# Altium PCB Current Transducer PCB.PcbDoc
Units mm, origin at the board's own origin, x right, y up, seen from the top; angles counter-clockwise.
Board outline 40 x 50.4 mm, 2 copper layers (Top Layer, Bottom Layer); 5 components, 4 nets, 20 pads, 0 vias.
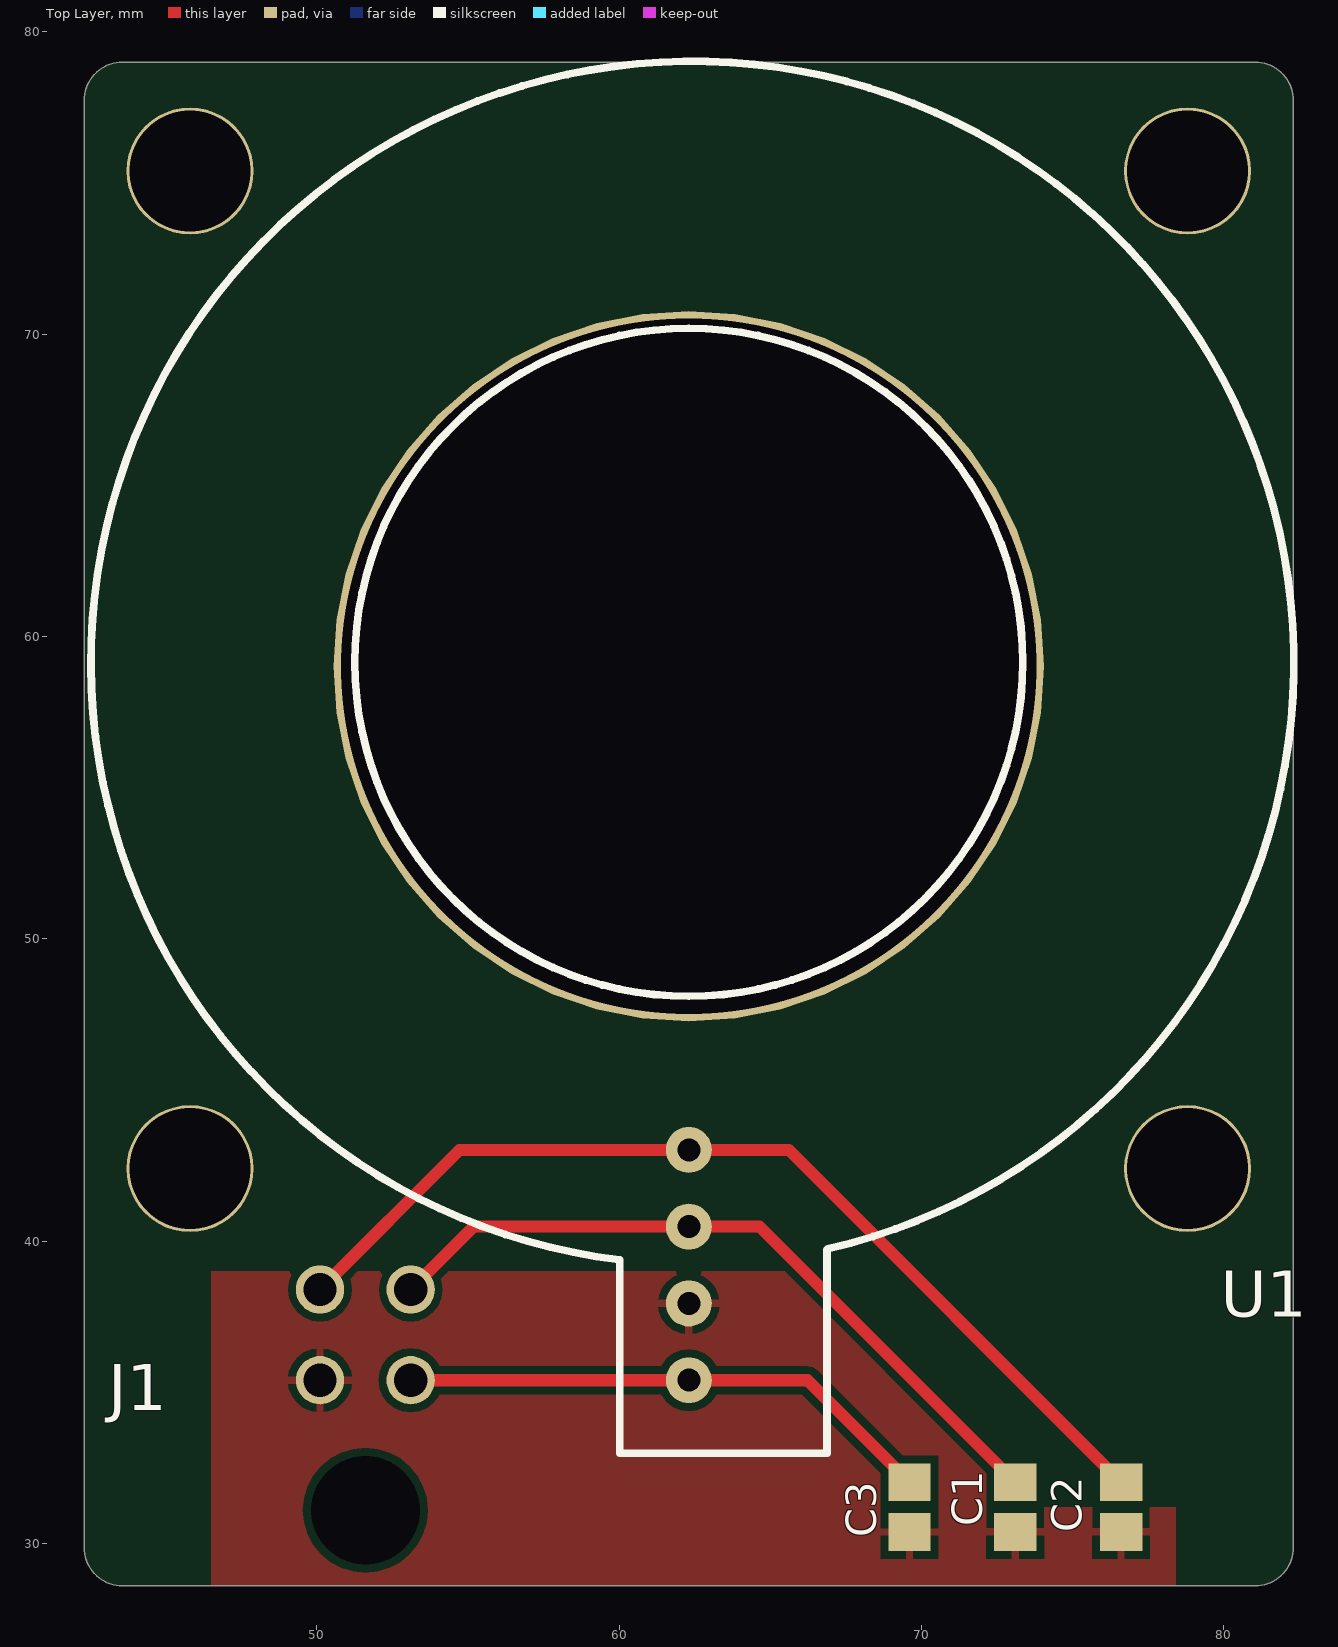
[diagram p0: Top Layer view]
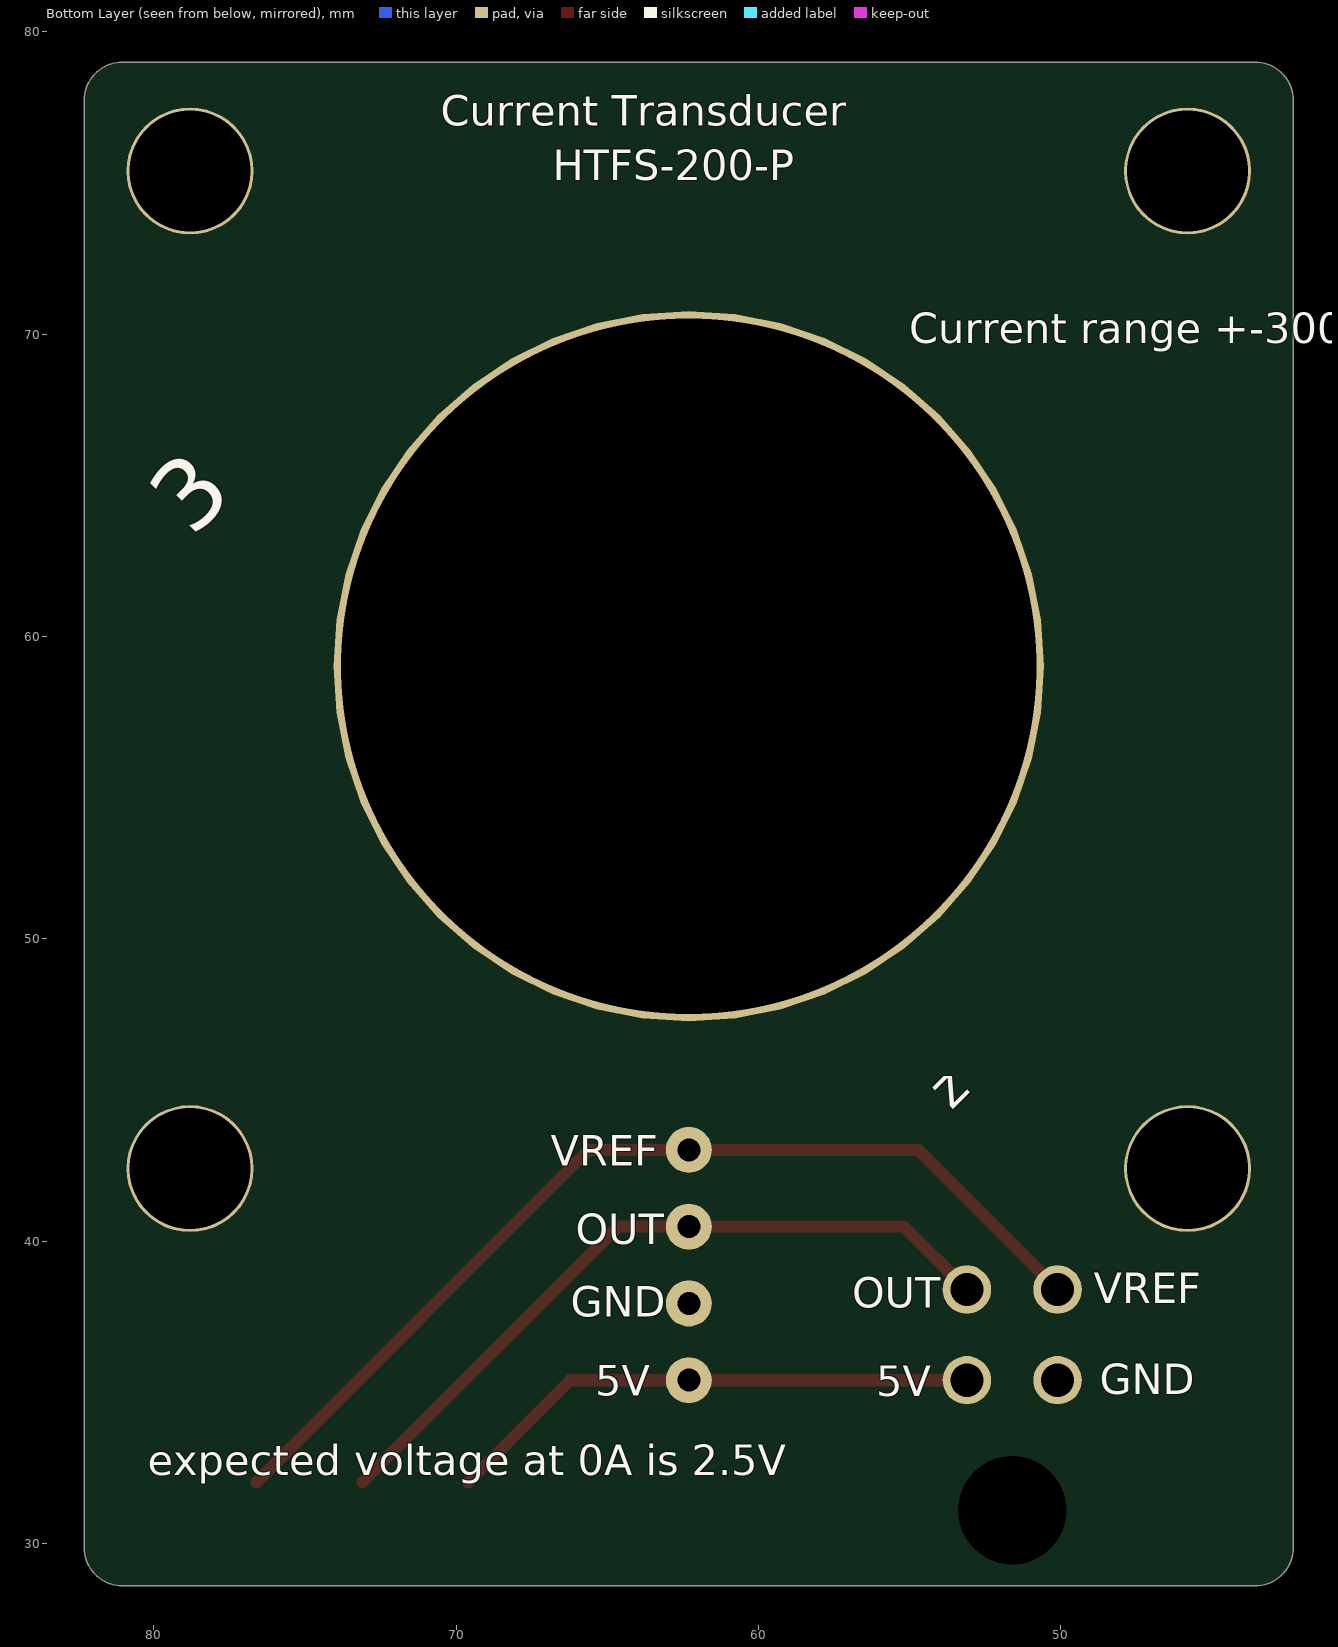
[diagram p1: Bottom Layer view, seen from below]
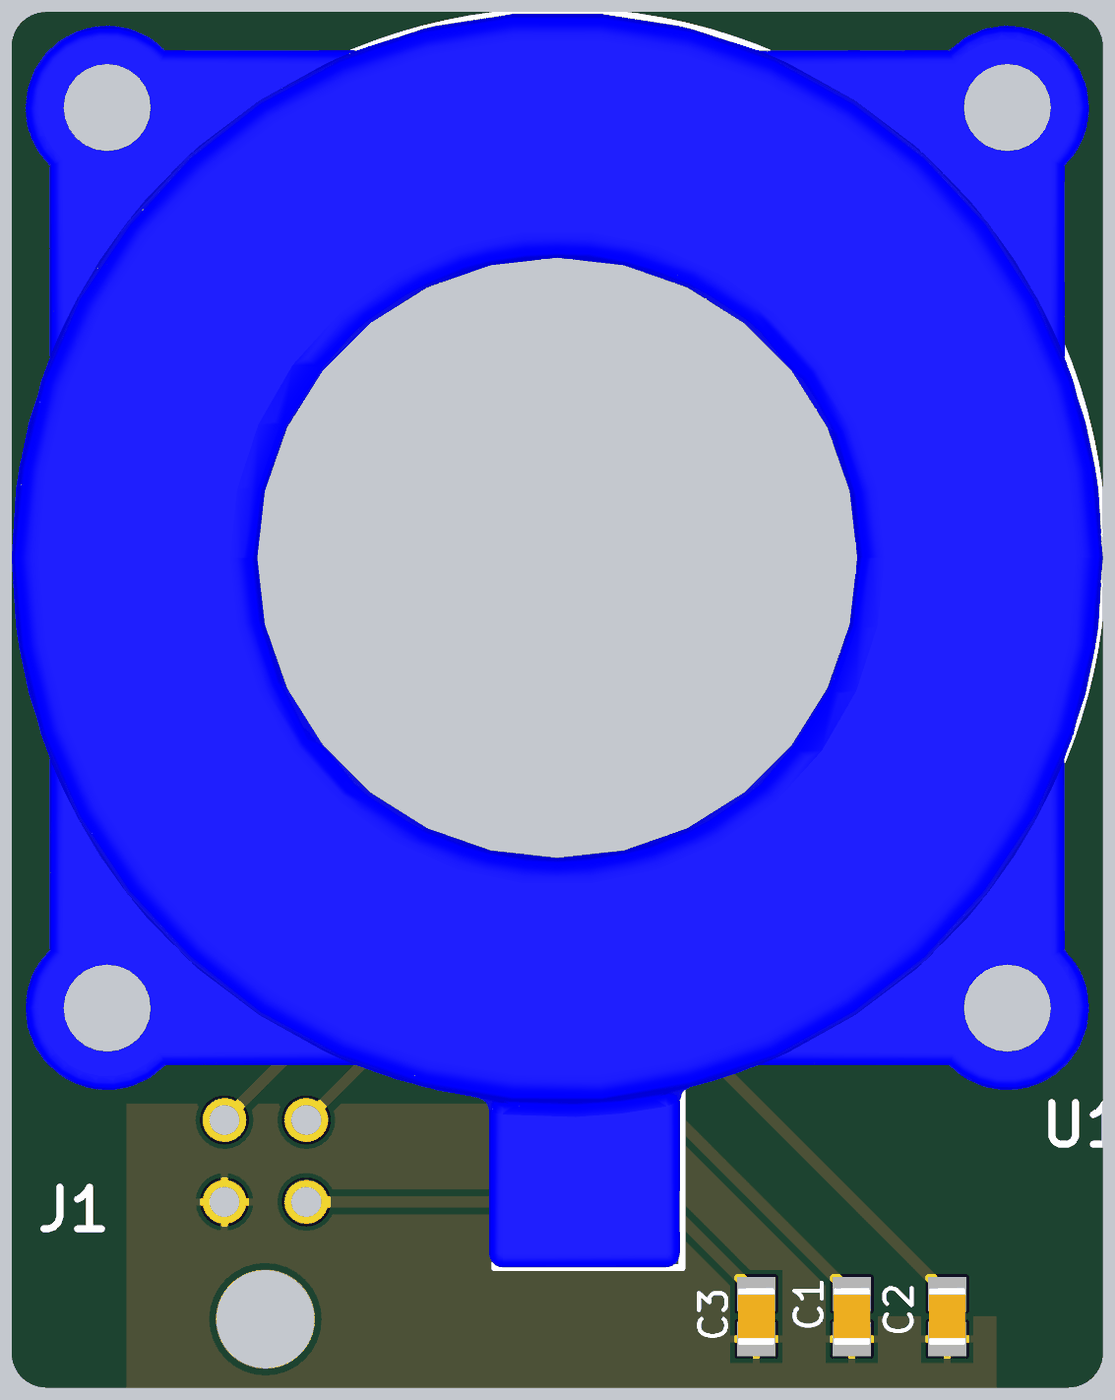
[diagram p2: 3D render of the assembled board from above, using the file's embedded part models]

## Layer stack, top to bottom
Top Solder: solder mask 0.0102, Solder Resist, Dk 3.5
Top Layer: signal copper 0.0356
Dielectric 1: dielectric 0.32, FR-4, Dk 4.8
Bottom Layer: signal copper 0.0356
Bottom Solder: solder mask 0.0102, Solder Resist, Dk 3.5

## Board outline
42.3,29.87 ccw(c43.57,29.87) 43.57,28.6 81.03,28.6 ccw(c81.03,29.87) 82.3,29.87 82.3,77.73 ccw(c81.03,77.73) 81.03,79 43.57,79 ccw(c43.57,77.73) 42.3,77.73

## Design rules (kind name [scope] priority, off if disabled: settings)
Clearance [All] p1: gap=0.254 ignorepadtopadclearanceinfootprint=FALSE except(0: Arc-Hole Track-Hole SMDPad-Hole THPad-Hole Via-Hole Fill-Hole Poly-Hole Region-Hole Text-Hole)
PolygonConnect [All] p1: connectstyle=Relief reliefconductorwidth=0.254 reliefentries=4 polygonreliefangle="90 Angle" airgapwidth=0.254
RoutingVias [All] p1: holewidth=0.711 width=1.27 viastyle="Through Hole" minholewidth=0.711 minwidth=1.27 maxholewidth=0.711 maxwidth=1.27
SolderMaskExpansion [All] p1: expansion=0.102
Width [All] p1: maxlimit=4 minlimit=0.254 preferedwidth=0.254
30 further rules are at their usual default settings.

## Components (designator, comment, footprint, x,y, rotation, side; value= is the part's Value field where it differs from the comment)
C1 "47nF" CAPC2012X10N 73.1,31.2 r90 top
C2 "47nF" CAPC2012X10N 76.6,31.2 r90 top
C3 "47nF" CAPC2012X10N 69.6,31.2 r90 top
J1 "Molex 4 Pin Header" "4 PIN HEADER" 53.1,38.4 r180 top
U1 "Current Transducer" "CURRENT TRANSDUCER" 62.3,35.4 r0 top

## Footprints (in the part's own frame and the unit in brackets; to place one, negate y for a bottom-side part, rotate by r counter-clockwise, add the part's x,y. Pads: shape width x height; smd on the part's side, far side on the other; paste and mask are expansions set on the pad)
"4 PIN HEADER" [mm]
  round 1.6 hole 1.1: 1(0,3) 2(3,3) 3(0,0) 4(3,0)
  round 3 hole 3.6: ""(1.5,7.3)
  body extent -3.32,-9.78 26.8,11.9, height 16.5
CAPC2012X10N [mm] "Chip Capacitor, 2-Leads, Body 2.00x1.25mm, IPC Medium Density"
  rect 1.25x1.4 smd: 1(-0.825,0) 2(0.825,0)
  body extent -1.05,-0.67 1.05,0.67, height 0.95
"CURRENT TRANSDUCER" [mm]
  round 1.52 hole 0.762: 1(0,0)
  round 1.524 hole 0.762: 2(0,2.54) 3(0,5.08) 4(0,7.62)
  round 23.5 hole 23: 23(0,23.62)
  round 4.2 hole 4: ""(-16.5,7) ""(-16.5,40) ""(16.5,7) ""(16.5,40)
  Top Layer pour cut-out: 16.764,0.254
  silkscreen extent -19.78,-2.41 20.01,43.63, body extent -20,-2.4 20,43.6, height 18

## Part data
C1 C2 C3: library part "47nF capacitor", Supplier Part Number 1=490-3254-6-ND, Supplier 1=Digi-Key
J1: Supplier Part Number 1=609-5286-ND, Supplier 1=Digi-Key
U1: Supplier Part Number 1=52K4609, Supplier 1=Newark

## Nets (pads, with @x,y where several pads share a name; then routed paths per layer and width w, separated by ;. In a path a pad name is that pad's centre, name@x,y a point inside that pad or via, vN(x,y) a via of type N, cw(c..) or ccw(c..) an arc to the next point about the centre after c; other vN are vias at no path point)
+5: C3.2 J1.1 U1.1 | length 18
  Top Layer w0.4: J1.1@53.1,35.6 53.3,35.4 U1.1 66.225,35.4 C3.2
GND: C1.1 C2.1 C3.1 J1.2 U1.2
Output: C1.2 J1.3 U1.3 | length 24.4
  Top Layer w0.4: J1.3 55.18,40.48 U1.3 64.645,40.48 C1.2
Vref: C2.2 J1.4 U1.4 | length 33
  Top Layer w0.4: J1.4 54.72,43.02 U1.4 65.605,43.02 C2.2
pads on no net: J1. U1. U1.23

## Polygon pours and split planes (outlines as drawn)
GND on Top Layer "Top Layer-GND" (solid, remove dead copper, pour order 0): 78.4,28.6 46.5,28.6 46.5,39 78.4,39

## Other copper
Top Layer:
  pour cut-out: 72.7,31.2 79,31.2 79,33.5 72.7,33.5

## Silkscreen, mask and mechanical layers (free items; w line width, h text height)
Bottom Overlay:
  text "Current Transducer" at 70.5,76.9 h1
  text "HTFS-200-P" at 66.8,75.1 h1
  text "Current range +-300A" at 55,69.7 h1
  text "3" at 78.2,62.7 h4 r315
  text "z" at 53.3,44 h2.25 r315
  text "VREF" at 66.872,42.5 h1
  text "OUT" at 66.033,39.9 h1
  text "VREF" at 48.9,37.94 h1
  text "OUT" at 56.9,37.8 h1
  text "GND" at 66.2,37.5 h1
  text "GND" at 48.7,34.937 h1
  text "5V" at 65.4,34.889 h1
  text "5V" at 56.1,34.868 h1
  text "expected voltage at 0A is 2.5V" at 80.2,32.25 h1
Mechanical 1:
  the board outline again, w0.15